# EAGLE board FluxR3-v3auto (EAGLE 7.2.0)
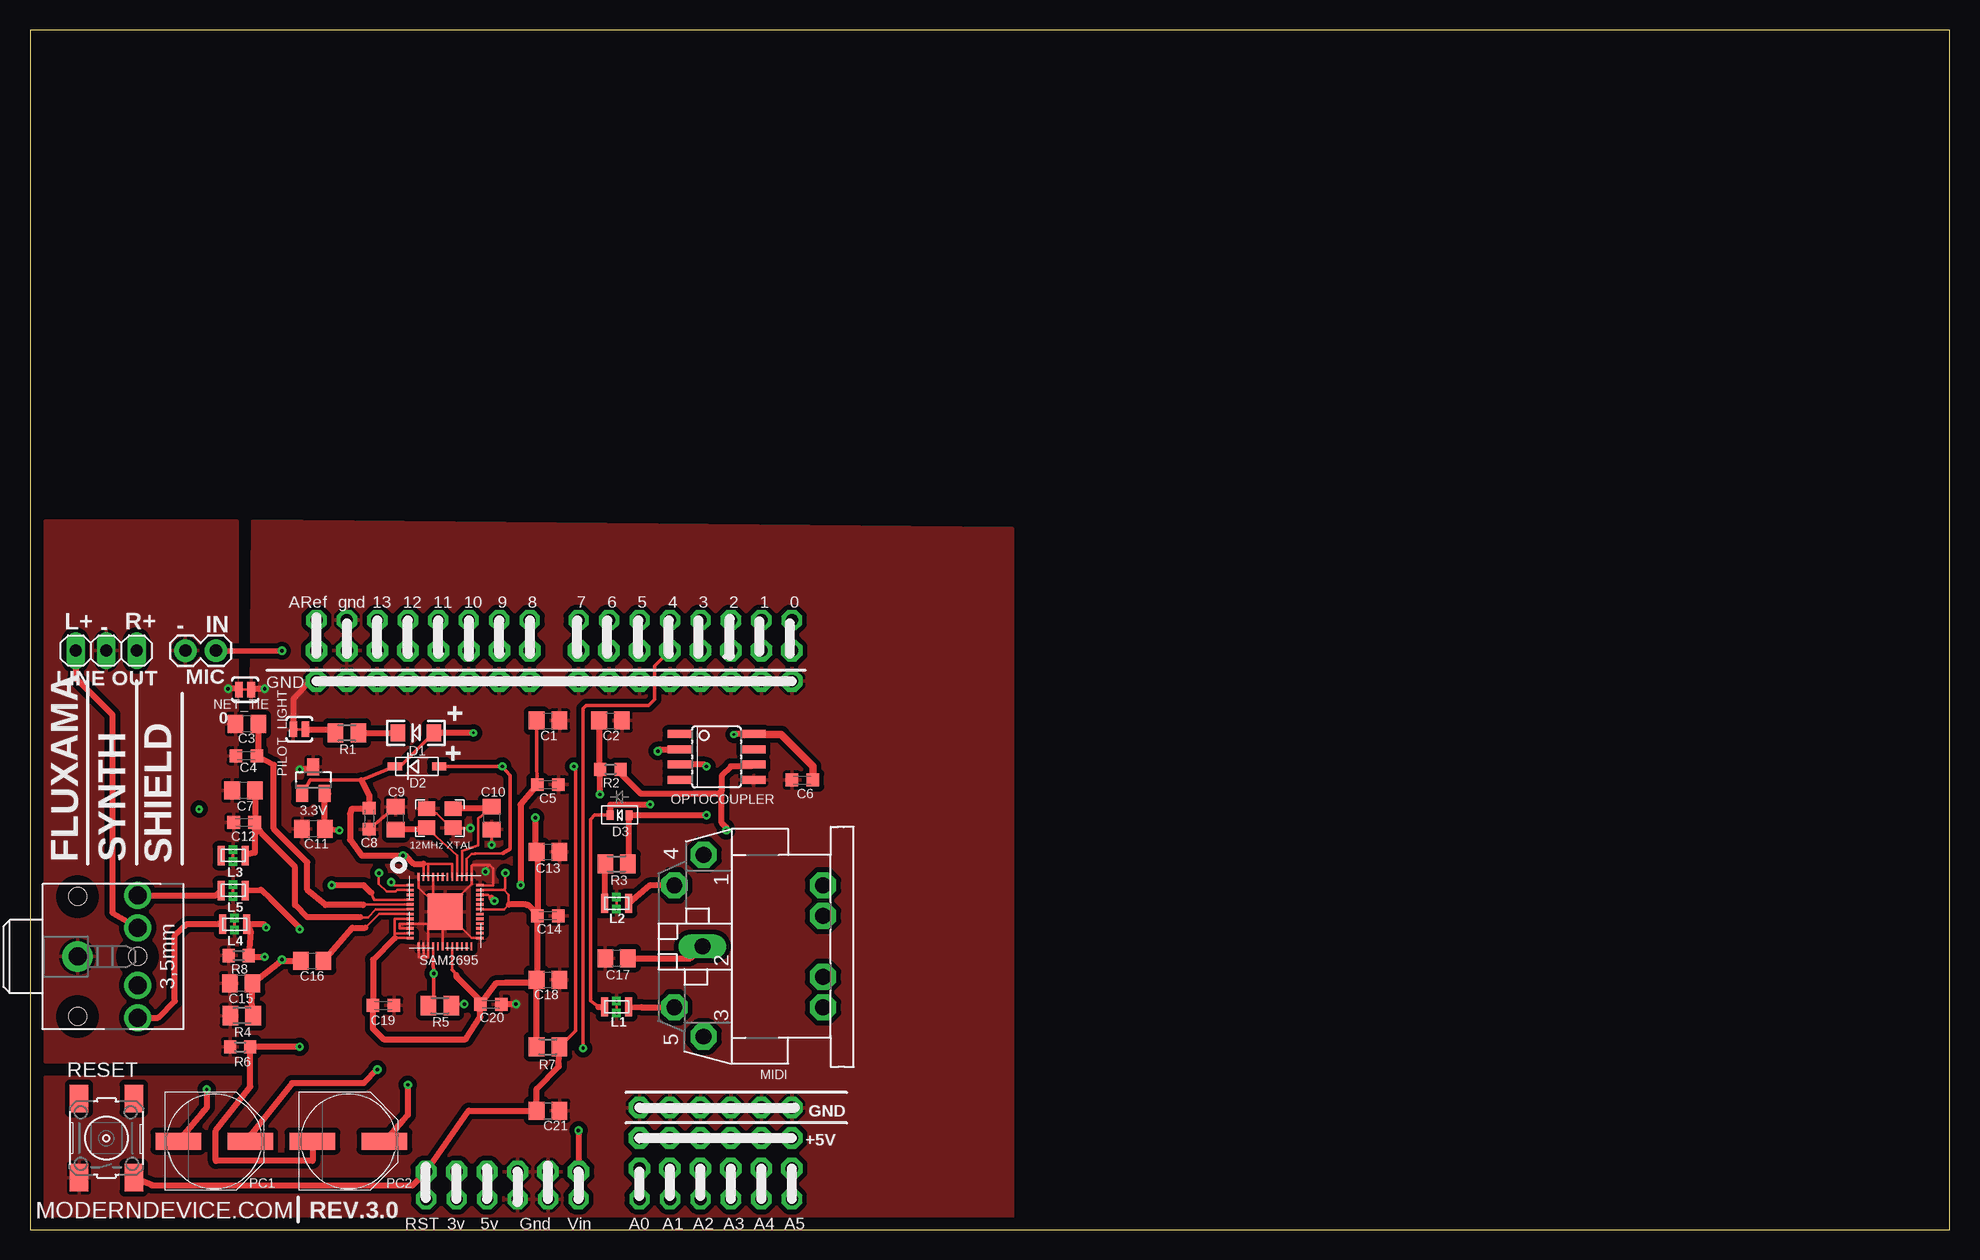
[diagram p0: board, top side]
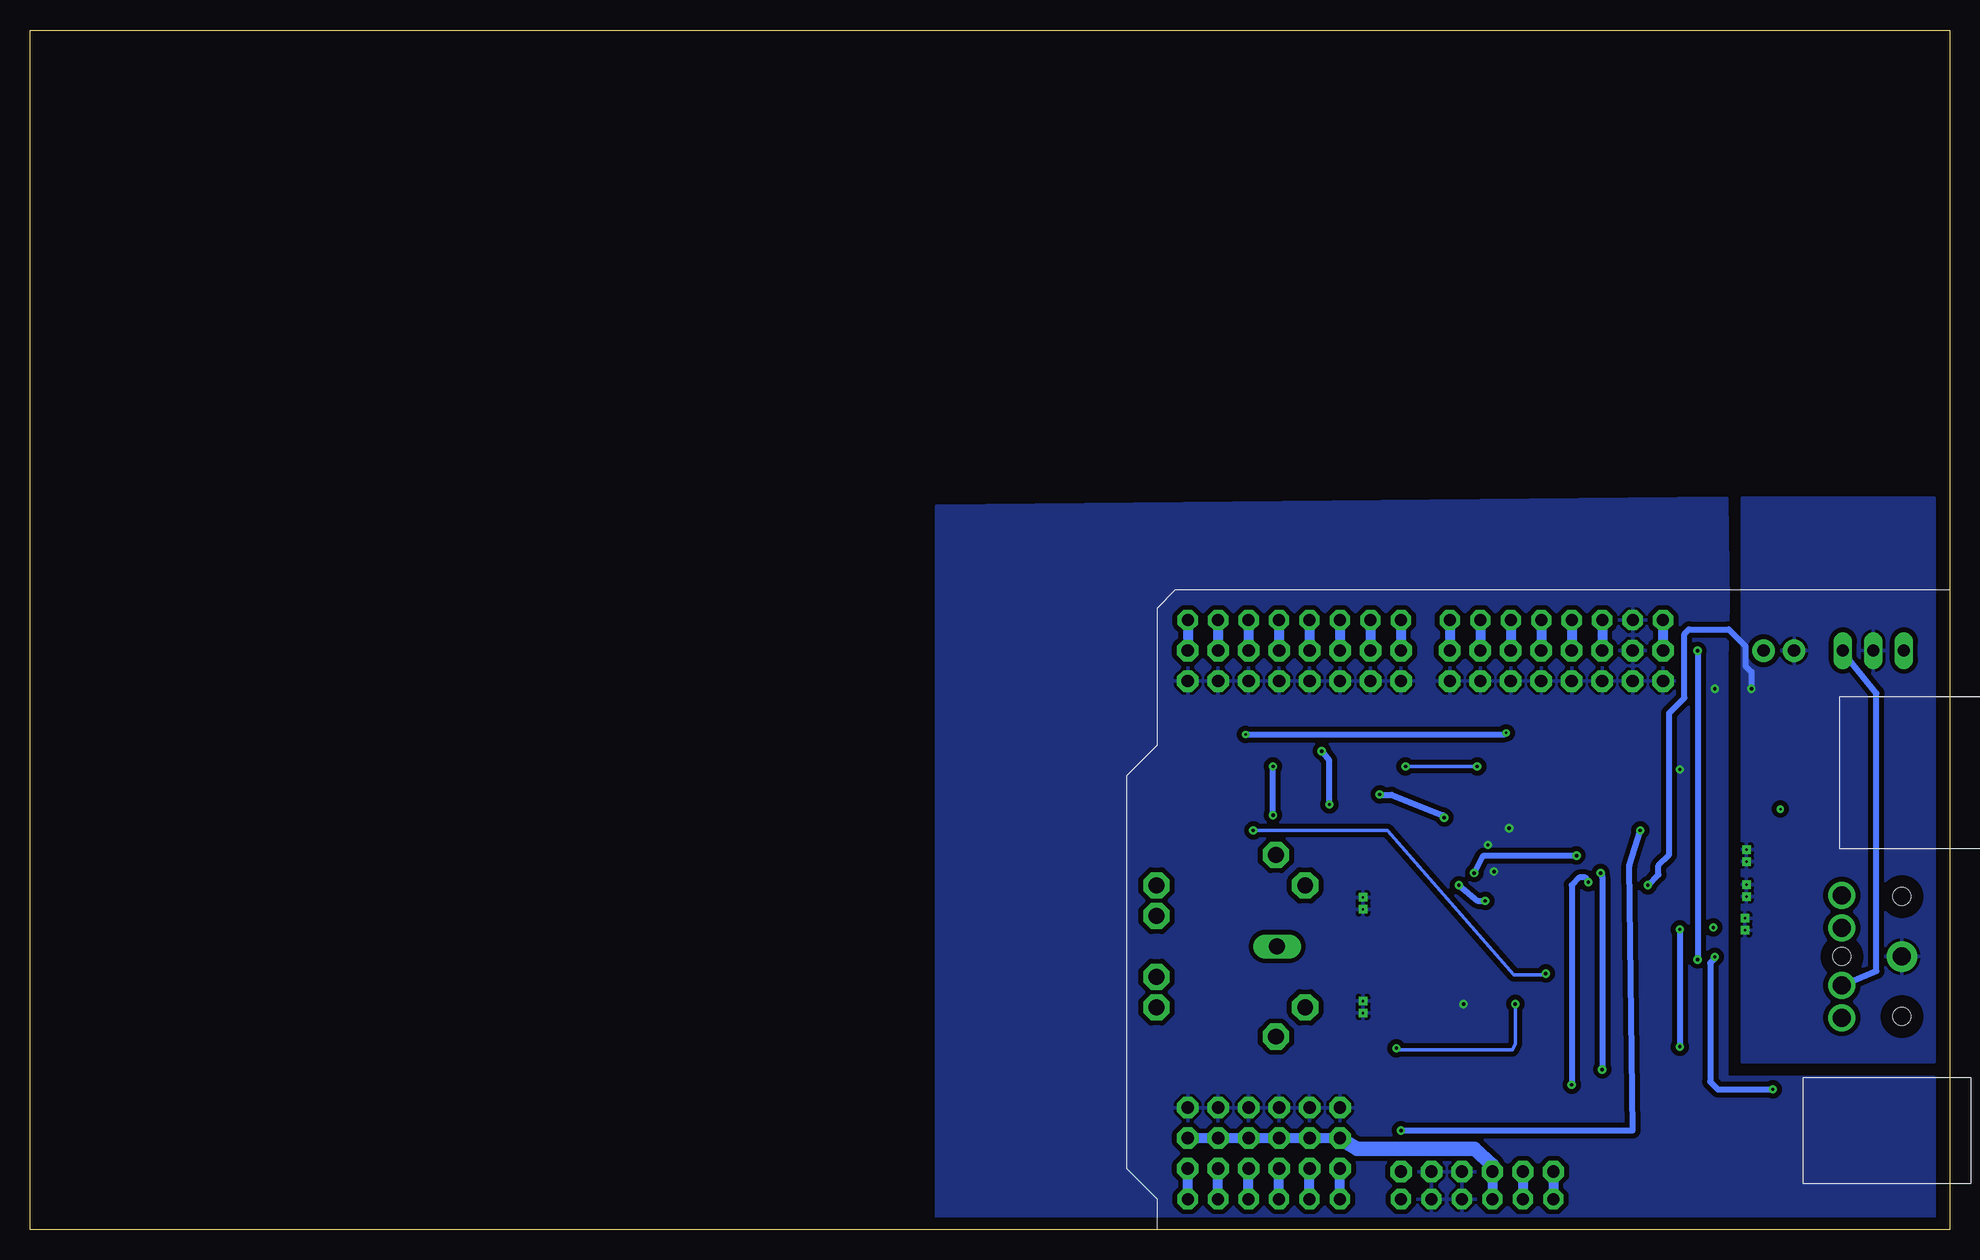
[diagram p1: board, bottom side, seen from below]

Size 160 x 100 mm. Coordinates in mm from the lower left corner, seen from the top.
Outline: 0,0 160,0 160,100 0,100 0,0
Copper layers (1*16): Top 0.035mm / dielectric 1.5mm / Bottom 0.035mm
Design rules "default *": minimum track width 0.2mm, minimum drill 0.25mm, track to track 0.2mm, track to pad 0.2mm, pad to pad 0.2mm, via to via 0.2mm, smd to smd 0.2mm, copper to edge 40mil, drill to drill 8mil, minimum pad ring 10mil, minimum via ring 8mil, stop-mask expansion 4mil, vias tented up to drill 0mil, thermal gap 10mil
Net classes: 0 default: width 0.2 mm, drill 0.25 mm, clearance 0.2 mm; 1 GND: width 0.2 mm, drill 0.25 mm, clearance 0.2 mm; 2 VCC: width 0.2 mm, drill 0.25 mm, clearance 0.2 mm; 3 VBUS: width 0.2 mm, drill 0.25 mm, clearance 0.25 mm

## Footprints (pad centres in the part's own frame; a part is rotated, then mirrored left to right if it is on the bottom)
SOT23 = smd 1 x 1.4: 1 -0.95,-1.1; 2 0.95,-1.1; 3 0,1.1
ARDUINO-NOHOLE = drill 1 pad 1.676 octagon: 3V 35.56,2.54; 5V 38.1,2.54; A0 50.8,2.54; A1 53.34,2.54; A2 55.88,2.54; A3 58.42,2.54; A4 60.96,2.54; A5 63.5,2.54; AREF 23.876,50.8; D0 63.5,50.8; D1 60.96,50.8; D2 58.42,50.8; D3 55.88,50.8; D4 53.34,50.8; D5 50.8,50.8; D6 48.26,50.8; D7 45.72,50.8; D8 41.656,50.8; D9 39.116,50.8; D10 36.576,50.8; D11 34.036,50.8; D12 31.496,50.8; D13 28.956,50.8; GND 26.416,50.8; GND1 43.18,2.54; GND2 40.64,2.54; RESET 33.02,2.54; VIN 45.72,2.54
C0805 = smd 1.3 x 1.5: 1 -0.95,0; 2 0.95,0
C0603K = smd 1.05 x 1.08: 1 -0.875,0; 2 0.875,0
LED-1206 = smd 1.2 x 1.4: A -1.5,0; C 1.5,0
SOD-123 = smd 1.2 x 0.7: A 1.85,0; C -1.85,0
SOD-523 = smd 0.8 x 0.6: A 0,-0.8; K 0,0.8
STX3100 = drill 1.5 pad 2.54: 1 2.7,-0.1 | drill 1.5: 2 7.7,5; 3 7.7,2.3; 4 7.7,-2.5; 5 7.7,-5.2 | hole 1.5: 2.7,4.9; 2.7,-5.1; 7.7,-0.1
3PC = smd 0.6 x 1.6: 1 0.998,0.013; 3 -1.002,0.013 | drill 0.2 pad 0.6 square: 2A -0.002,-0.487; 2B -0.002,0.513
1X03 = drill 1.016 long: 1 -2.54,0; 2 0,0; 3 2.54,0
1X02 = drill 1.016 pad 1.88: 1 0,0; 2 2.54,0
CP-2350 = drill 1.321 pad 2.184 octagon: 1 7.62,12.58; 3 -7.52,12.58; 4 5.08,15.02; 5 -5.08,15.02; PE -2.54,2.62; PE1 -5.08,2.62; PE2 5.08,2.62; PE@ 2.54,2.62 | drill 1.321 long: 2 0,12.68
MODERNDEVICE_SJ_2S-TRACE = smd 0.635 x 1.27: 1 -0.508,0; 2 0.508,0
SOIC08 = smd 0.66 x 2.032: 1 -1.905,-3.073; 2 -0.635,-3.073; 3 0.635,-3.073; 4 1.905,-3.073; 5 1.905,3.073; 6 0.635,3.073; 7 -0.635,3.073; 8 -1.905,3.073
PANASONIC_E = smd 3.8 x 1.4: + 3,0; - -3,0
MODERNDEVICE_NX3225 = smd 1.4 x 1.2: 1 -1.1,-0.8; 2 1.1,-0.8; 3 1.1,0.8; 4 -1.1,0.8
M0805 = smd 1.3 x 1.6: 1 -0.95,0; 2 0.95,0
R0603 = smd 1 x 1.1: 1 -0.85,0; 2 0.85,0
6MM_SWITCH = smd 2.286 x 1.524: 1 -3.302,2.286; 2 3.302,2.286; 3 -3.302,-2.286; 4 3.302,-2.286
QFN48 = smd 0.65 x 0.2: 1 -2.9,2.3; 2 -2.9,1.9; 3 -2.9,1.5; 4 -2.9,1.1; 5 -2.9,0.7; 6 -2.9,0.3; 7 -2.9,-0.1; 8 -2.9,-0.5; 9 -2.9,-0.9; 10 -2.9,-1.3; 11 -2.9,-1.7; 12 -2.9,-2.1; 25 2.9,-2.1; 26 2.9,-1.7; 27 2.9,-1.3; 28 2.9,-0.9; 29 2.9,-0.5; 30 2.9,-0.1; 31 2.9,0.3; 32 2.9,0.7; 33 2.9,1.1; 34 2.9,1.5; 35 2.9,1.9; 36 2.9,2.3 | smd 0.2 x 0.65: 13 -2.2,-2.8; 14 -1.8,-2.8; 15 -1.4,-2.8; 16 -1,-2.8; 17 -0.6,-2.8; 18 -0.2,-2.8; 19 0.2,-2.8; 20 0.6,-2.8; 21 1,-2.8; 22 1.4,-2.8; 23 1.8,-2.8; 24 2.2,-2.8; 37 2.2,3; 38 1.8,3; 39 1.4,3; 40 1,3; 41 0.6,3; 42 0.2,3; 43 -0.2,3; 44 -0.6,3; 45 -1,3; 46 -1.4,3; 47 -1.8,3; 48 -2.2,3 | smd 3 x 3: EXP 0,0.1
1X8_CLEAN = drill 1.016 pad 1.778 octagon: P$1 -8.89,0; P$2 -6.35,0; P$3 -3.81,0; P$4 -1.27,0; P$5 1.27,0; P$6 3.81,0; P$7 6.35,0; P$8 8.89,0
1X6_CLEAN = drill 1.016 pad 1.778 octagon: P$1 -6.35,0; P$2 -3.81,0; P$3 -1.27,0; P$4 1.27,0; P$5 3.81,0; P$6 6.35,0

## Placement (x,y rotation side)
3.3V  3.3V  [SOT23]  23.62,37.47 0 top
ARDUINO  ARDUINO-NOHOLE  [ARDUINO-NOHOLE]  0,0 0 top
C1  10uf  [C0805]  43.18,42.42 0 top
C2  .1uf  [C0805]  48.39,42.42 0 top
C3  10uf  [C0805]  18.08,42.14 180 top
C4  .1uf  [C0603K]  18.03,39.5 180 top
C5  .1uf  [C0603K]  43.18,37.08 0 top
C6  .1uf  [C0603K]  64.39,37.47 180 top
C7  10uf  [C0805]  17.81,36.6 180 top
C8  .1uf  [C0603K]  28.27,34.23 270 top
C9  22pf  [C0805]  30.48,34.29 90 top
C10  22pf  [C0805]  38.48,34.29 270 top
C11  10uf  [C0805]  23.62,33.4 180 top
C12  .1uf  [C0603K]  17.86,33.93 180 top
C13  10uf  [C0805]  43.18,31.5 0 top
C14  .1uf  [C0603K]  43.18,26.16 0 top
C15  220pf  [C0805]  17.6,20.52 180 top
C16  1uf  [C0805]  23.52,22.38 180 top
C17  .1uf  [C0805]  48.9,22.61 180 top
C18  10uf  [C0805]  43.18,20.83 0 top
C19  .1uf  [C0603K]  29.46,18.67 0 top
C20  .1uf  [C0603K]  38.41,18.77 0 top
C21  1uF  [C0805]  43.18,9.91 0 top
D1  [LED-1206]  32.18,41.4 180 top
D2  [SOD-123]  32.26,38.61 0 top
D3  [SOD-523]  49.15,34.54 90 top
JACK  STEREOJACK  [STX3100]  1.27,22.86 0 top
L1  NFM21CC223R1H3D  [3PC]  48.9,18.54 0 top
L2  NFM21CC223R1H3D  [3PC]  48.9,27.18 0 top
L3  NFM21CC223R1H3D  [3PC]  16.93,31.16 0 top
L4  NFM21CC223R1H3D  [3PC]  17.06,25.44 0 top
L5  NFM21CC223R1H3D  [3PC]  16.93,28.24 0 top
LINEOUT  [1X03]  6.35,48.26 0 top
MIC_JACK  [1X02]  12.95,48.26 0 top
MIDI  MIDIJACK  [CP-2350]  68.73,23.6 90 top
NET_TIE  MODERNDEVICE_SOLDERJUMPERTRACE  [MODERNDEVICE_SJ_2S-TRACE]  17.93,45.01 180 top
OPTOCOUPLER  HCPL0500  [SOIC08]  57.22,39.4 270 top
PC1  100u  [PANASONIC_E]  15.37,7.37 0 top
PC2  100u  [PANASONIC_E]  26.54,7.37 0 top
PILOT_LIGHT  MODERNDEVICE_SOLDERJUMPERTRACE  [MODERNDEVICE_SJ_2S-TRACE]  22.45,41.71 0 top
Q1  CX3225GB12000P0HPQCC, 253-1168-1-ND  [MODERNDEVICE_NX3225]  34.16,34.29 0 top
R1  1K  [M0805]  26.42,41.4 0 top
R2  4.7k  [R0603]  48.39,38.35 0 top
R3  220  [M0805]  48.9,30.48 180 top
R4  4.7k  [M0805]  17.65,17.83 0 top
R5  220  [M0805]  34.16,18.67 180 top
R6  47k  [R0603]  17.52,15.22 0 top
R7  10k  [M0805]  43.18,15.24 180 top
R8  47k  [R0603]  17.4,22.84 0 top
RESET  [6MM_SWITCH]  6.37,7.62 90 top
SAM2695  SAM2695  [QFN48]  34.6,26.4 0 top
U$1  1X8_CLEAN  [1X8_CLEAN]  32.77,48.26 0 top
U$2  1X8_CLEAN  [1X8_CLEAN]  54.61,48.26 0 top
U$3  1X8_CLEAN  [1X8_CLEAN]  32.77,45.72 0 top
U$4  1X8_CLEAN  [1X8_CLEAN]  54.61,45.72 0 top
U$10  1X6_CLEAN  [1X6_CLEAN]  57.15,10.16 0 top
U$11  1X6_CLEAN  [1X6_CLEAN]  57.15,7.62 0 top
U$12  1X6_CLEAN  [1X6_CLEAN]  39.37,4.83 180 top
U$13  1X6_CLEAN  [1X6_CLEAN]  57.15,5.08 180 top

## Library data of the parts
3.3V RESET = ng
ARDUINO D1-D3 L1-L5 MIC_JACK MIDI PC1 PC2 SAM2695 U$1-U$4 U$10-U$13 = ModernDevice
C1-C21 R1-R8 = rcl
JACK = adafruit
LINEOUT = pinhead
NET_TIE PILOT_LIGHT Q1 = BBLeo_v2
OPTOCOUPLER = optocoupler; MF: AGILENT TECHNOLOGIES; MPN: HCPL-0500-000E; OC_FARNELL: 9995226; OC_NEWARK: 31K6926

## Nets
+3V3 [VCC]: 3.3V.1 C2.1 C6.1 C8.1 C13.1 C14.1 C18.1 C19.1 C20.1 D1.A D2.C OPTOCOUPLER.8 R2.1 R7.2 SAM2695.8 SAM2695.11 SAM2695.12 SAM2695.20 SAM2695.31 SAM2695.35 SAM2695.41 SAM2695.46 SAM2695.47
+5V [VCC]: ARDUINO.5V U$11.P$1 U$11.P$2 U$11.P$3 U$11.P$4 U$11.P$5 U$11.P$6 U$12.P$4
A0: ARDUINO.A0 U$13.P$6
A1: ARDUINO.A1 U$13.P$5
A2: ARDUINO.A2 U$13.P$4
A3: ARDUINO.A3 U$13.P$3
A4: ARDUINO.A4 U$13.P$2
A5: ARDUINO.A5 U$13.P$1
AGND [GND]: C3.2 C4.2 C7.2 C12.2 C15.2 JACK.1 L3.2A L3.2B L4.2A L4.2B L5.2A L5.2B LINEOUT.2 MIC_JACK.1 NET_TIE.2 R4.1 R6.1 R8.1 SAM2695.4
AOUTL: PC2.+ SAM2695.1
AOUTR: PC1.+ SAM2695.2
GND [GND]: 3.3V.3 ARDUINO.GND ARDUINO.GND1 ARDUINO.GND2 C1.2 C2.2 C5.2 C6.2 C8.2 C9.2 C10.2 C11.2 C13.2 C14.2 C17.2 C18.2 C19.2 C20.2 C21.2 L1.2A L1.2B L2.2A L2.2B NET_TIE.1 OPTOCOUPLER.5 PILOT_LIGHT.1 Q1.2 Q1.4 RESET.1 SAM2695.9 SAM2695.10 SAM2695.13 SAM2695.14 SAM2695.15 SAM2695.18 SAM2695.25 SAM2695.36 SAM2695.37 SAM2695.45 SAM2695.48 SAM2695.EXP U$1.P$2 U$3.P$1 U$3.P$2 U$3.P$3 U$3.P$4 U$3.P$5 U$3.P$6 U$3.P$7 U$3.P$8 U$4.P$1 U$4.P$2 U$4.P$3 U$4.P$4 U$4.P$5 U$4.P$6 U$4.P$7 U$4.P$8 U$10.P$1 U$10.P$2 U$10.P$3 U$10.P$4 U$10.P$5 U$10.P$6 U$12.P$2 U$12.P$3
MICIN: C16.1 SAM2695.7
MICROPHONE: C15.1 C16.2 MIC_JACK.2 R4.2
MIDI_FROM_ARDUINO: ARDUINO.D4 R5.1 U$2.P$4
MIDI_IN: OPTOCOUPLER.6 R2.2 R5.2 SAM2695.16
N$1: ARDUINO.D1 U$2.P$7
N$2: L2.1 MIDI.4
N$4: ARDUINO.3V U$12.P$5
N$5: L5.1 PC2.- R6.2
N$6: JACK.5 L4.3
N$7: L2.3 R3.2
N$8: D3.K L1.3 OPTOCOUPLER.2
N$9: D1.C R1.2
N$10: C17.1 MIDI.2
N$11: L1.1 MIDI.5
N$13: D3.A OPTOCOUPLER.3 R3.1
N$14 [VCC]: L3.3
N$15: ARDUINO.D8 U$1.P$8
N$19: ARDUINO.D9 U$1.P$7
N$21: JACK.4 LINEOUT.3
N$22: ARDUINO.D11 U$1.P$5
N$23: ARDUINO.D10 U$1.P$6
N$24: JACK.3 LINEOUT.1
N$25: ARDUINO.D12 U$1.P$4
N$26: ARDUINO.D13 U$1.P$3
N$27: ARDUINO.D6 U$2.P$2
N$28: ARDUINO.AREF U$1.P$1
N$29: ARDUINO.D5 U$2.P$3
N$30: ARDUINO.D0 U$2.P$8
N$31: ARDUINO.D2 U$2.P$6
N$32: ARDUINO.D3 U$2.P$5
N$35: ARDUINO.D7 U$2.P$1
N$47: PILOT_LIGHT.2 R1.1
OUT_L: JACK.2 L5.3
OUT_R: L4.1 PC1.- R8.2
OUTVC12: C1.1 C5.1 SAM2695.34
RST: ARDUINO.RESET C21.1 D2.A R7.1 RESET.3 SAM2695.38 U$12.P$6
VA33 [VCC]: C7.1 C12.1 L3.1 SAM2695.6
VCM: C3.1 C4.1 SAM2695.5
VIN [VCC]: 3.3V.2 ARDUINO.VIN C11.1 U$12.P$1
XTL1: C10.1 Q1.3 SAM2695.39
XTL2: C9.1 Q1.1 SAM2695.40

## Tracks (layer width: path | path; a pad name or v marks a point on that pad's centre or on a via)
+3V3  (via drill 0.2 pad 0.61, 0.28)
  Top 0.2: SAM2695.8 30.4,25.9 30.4,24.7 | SAM2695.11 30.4,24.7 | SAM2695.12 30.4,24.3 30.4,24.7 | 35.2,23.54 SAM2695.20 35.2,21.66 | SAM2695.31 39.5,26.7 39.9,27.1 39.9,27.9 39.5,28.3 | 39.5,28.3 SAM2695.35 | SAM2695.47 32.8,30.5 33.2,30.5 | 33.2,30.5 SAM2695.46 | SAM2695.41 35.2,30.5 33.2,30.5 | 39.5,28.3 39.62,28.42 v39.62,29.72
  Top 0.305: D2.C 30.86,38.61 33.66,41.4 33.78,41.3 D1.A | D2.C 30.5,38.61 | 3.3V.1 22.67,36.26 23.37,37.47 27.64,37.47 D2.C | 35.2,21.66 35.56,21.21 | 37.53,19.11 C20.1
  Top 0.508: OPTOCOUPLER.8 58.7,41.3 v58.67,41.27 | v36.96,41.4 D1.A | C2.1 47.44,38.45 R2.1 47.5,38.31 v47.5,36.28 | R7.2 C18.1 | C18.1 41.98,20.57 39.62,20.57 38.8,20.52 C20.1 37.53,17.72 36.32,15.88 29.46,15.88 28.57,16.76 28.57,18.66 C19.1 28.59,22.49 30.4,24.3 | C18.1 42.3,20.9 C14.1 | 27.64,37.47 28.27,36.19 C8.1 28.22,35.05 26.8,35.05 26.67,34.67 26.67,32.51 27.66,31.17 v31.09,31.17 31.32,31.17 31.98,30.5 32.8,30.5 | C14.1 42.29,26.18 42.29,26.29 41.53,27.05 41.4,27.05 41.35,27.1 39.9,27.1 | C14.1 42.3,31.42 C13.1 42.33,31.88 42.09,31.94 v42.12,34.34 | 37.53,19.11 35.56,21.08 35.56,21.21
  Top 0.61: C6.1 65.26,38.62 62.61,41.27 60.32,41.27 OPTOCOUPLER.8
  Bottom 0.508: v58.67,41.27 37.08,41.27 v36.96,41.4 | v39.62,29.72 38.84,31.17 v31.09,31.17 | v47.5,36.28 47.5,36.25 46.49,36.23 42.23,34.54 v42.12,34.34
+5V
  Bottom 0.508: 38.1,5.33 38.1,4.32
  Bottom 0.813: U$11.P$1 U$11.P$2 U$11.P$3 U$11.P$4 U$11.P$5 U$11.P$6 | U$12.P$4 38.1,4.32 ARDUINO.5V
  Bottom 1.216: U$11.P$1 49.4,6.73 39.62,6.73 38.1,5.33
A0
  Bottom 0.813: ARDUINO.A0 U$13.P$6
A1
  Bottom 0.813: ARDUINO.A1 U$13.P$5
A2
  Bottom 0.813: ARDUINO.A2 U$13.P$4
A3
  Bottom 0.813: ARDUINO.A3 U$13.P$3
A4
  Bottom 0.813: ARDUINO.A4 U$13.P$2
A5
  Bottom 0.813: ARDUINO.A5 U$13.P$1
AGND  (via drill 0.28)
  Top 0.2: 28.45,28.07 28.7,27.5 SAM2695.4
  Top 0.508: NET_TIE.2 17.37,45.09 v16.51,45.09 | 28.45,28.07 27.81,28.7 v25.15,28.7 | R8.1 16.65,22.68
  Bottom 0.508: 16.86,24.97 L4.2A | v25.15,28.7 24.26,29.59 24.26,30.35 23.37,31.24 23.37,43.05 22.1,44.32 22.1,49.66 21.72,50.04 18.41,50.04 17.02,48.64 17.02,46.99 16.51,46.48 v16.51,45.09
  pour Bottom (isolate 0.406): 1.27,60.96 17.27,60.96 17.27,13.97 1.27,13.97
  pour Top (isolate 0.406): 1.27,59.05 17.27,59.05 17.27,13.97 1.27,13.97
AOUTL  (via drill 0.28)
  Top 0.2: 30.5,28.7 SAM2695.1 30.35,28.7 v30.1,28.96
  Top 0.508: v31.5,12.06 31.5,9.53 31.07,9.06 PC2.+
  Bottom 0.2: v30.1,28.96 30.1,29.08
  Bottom 0.508: 30.1,29.08 30.35,29.34 30.86,29.34 31.5,28.7 v31.5,12.06
AOUTR  (via drill 0.28)
  Top 0.2: SAM2695.2 30.59,28.3 30.48,28.19 29.72,28.19 29.08,28.83 v29.08,29.72
  Top 0.508: v28.96,13.34 27.81,12.19 21.84,12.19 18.37,7.83 PC1.+
  Bottom 0.508: v29.08,29.72 28.96,29.34 v28.96,13.34
GND  (via drill 0.28)
  Top 0.2: SAM2695.18 34.4,25.9 34.6,26.1 SAM2695.EXP | SAM2695.13 32.4,22.7 32.8,22.7 | 32.8,22.7 33.2,22.7 SAM2695.15 33.2,25.5 | SAM2695.14 32.8,22.7 | SAM2695.25 36.8,24.3 SAM2695.EXP | SAM2695.EXP 33.6,25.5 33.2,25.5 | 33.2,25.5 SAM2695.9 30.8,25.5 30.8,25.1 SAM2695.10 | SAM2695.45 33.6,27.3 | 33.6,27.3 33.6,27.1 34.2,26.5 SAM2695.EXP | 38.3,30.4 36.9,30.4 36.8,30.3 SAM2695.37 36.8,28.8 34.6,26.6 SAM2695.EXP | 38.3,30.4 38.6,30.1 38.6,28.7 SAM2695.36 | SAM2695.48 32.4,28.5 33.6,27.3 | Q1.4 33.86,34.67 33.91,34.67 35.09,33.49 Q1.2 35.56,33.45 v36.7,33.45 | C10.2 v38.48,32.06 | 38.3,30.4 37.97,30.07 v37.97,29.84
  Top 0.305: C9.2 28.22,33.36
  Top 0.508: U$3.P$1 23.37,45.72 21.94,44.18 21.94,41.79 PILOT_LIGHT.1 | NET_TIE.1 18.39,45.21 18.52,45.09 v19.56,45.09 | 28.22,33.36 C8.2 | 3.3V.3 23.32,38.35 v22.48,38.35 | C20.2 39.31,18.8 v40.51,18.8
  Bottom 0.2: v37.97,29.84 37.85,29.84 | v36.7,33.45 36.7,33.4
  pour Bottom (isolate 0.406): 18.54,60.96 18.44,52.12 18.54,47.45 18.54,12.7 1.27,12.7 1.27,-10.79 84.45,-11.43 84.45,60.33
  pour Top (isolate 0.406): 18.54,59.05 18.44,44.45 18.44,44.45 18.44,12.7 1.27,12.7 1.27,-8.89 81.92,-9.53 81.92,58.42
MICIN
  Top 0.2: 27.94,25.15 29.09,26.3 SAM2695.7
  Top 0.508: C16.1 26.86,25.15 27.94,25.15
MICROPHONE  (via drill 0.28)
  Top 0.508: MIC_JACK.2 v21,48.25 | v21,22.5 20.95,22.55 | R4.2 18.43,18.92 C15.1 20.89,22.35 v21,22.5 | 22.14,22.43 C16.2 21.06,22.38 v21,22.5
  Bottom 0.508: v21,48.25 v21,22.5
MIDI_FROM_ARDUINO  (via drill 0.28)
  Top 0.305: U$2.P$4 52.07,46.99 52.07,44.2 51.56,43.69 46.35,43.69 46.1,43.43 v46.1,15.11 | v36.2,18.8 35.37,18.73 R5.1
  Bottom 0.305: v46.1,15.11 45.97,14.99 36.45,14.99 36.2,15.49 v36.2,18.8
  Bottom 0.813: ARDUINO.D4 U$2.P$4
MIDI_IN  (via drill 0.28)
  Top 0.2: SAM2695.16 33.6,22.17
  Top 0.305: R5.2 33.66,19.11 v33.66,21.34 33.66,21.48 33.6,22.17 | v58.04,33.27 58.04,33.53
  Top 0.508: OPTOCOUPLER.6 60.14,38.61 58.42,38.61 57.66,37.85 57.66,36.58 | 57.66,36.58 57.4,36.32 50.93,36.32 49.24,38.01 R2.2 | 58.04,33.53 57.66,33.91 57.66,36.58
  Bottom 0.305: v33.66,21.34 33.66,21.21 36.32,21.21 46.86,33.27 v58.04,33.27
N$1
  Bottom 0.813: ARDUINO.D1 U$2.P$7
N$2
  Top 0.508: MIDI.4 51.64,28.68 L2.1
N$4
  Bottom 0.813: U$12.P$5 ARDUINO.3V
N$5  (via drill 0.28)
  Top 0.508: PC2.- 23.54,5.71 15.49,5.71 15.49,8.26 18.37,11.9 R6.2 22.33,15.22 22.35,15.24 v22.48,15.24 | 17.96,28.4 L5.1 19.26,28.32 20.07,27.56 22.48,25.15 v22.48,25.02
  Bottom 0.508: v22.48,25.02 v22.48,15.24
N$6
  Top 0.508: JACK.5 10.68,17.66 12.06,19.05 12.06,24.51 13.09,25.48 15.71,25.48 L4.3
N$7
  Top 0.508: R3.2 47.89,30.43 L2.3
N$8  (via drill 0.28)
  Top 0.305: D3.K 47.08,34.54 46.74,34.2 46.74,19.05 47.38,18.55
  Top 0.508: D3.K 48.39,34.58 48.39,35.43 v51.69,35.43 | v52.32,39.88 52.48,40.03 OPTOCOUPLER.2 | 47.38,18.55 L1.3
  Bottom 0.508: v51.69,35.43 51.69,39.12 v52.32,39.88
N$9
  Top 0.508: R1.2 D1.C
N$10
  Top 0.508: C17.1 55.05,22.61 MIDI.2
N$11
  Top 0.508: L1.1 50.94,18.52 MIDI.5
N$13  (via drill 0.28)
  Top 0.508: R3.1 49.95,30.63 D3.A v56.39,34.54 | v56.39,38.61 56.23,38.76 OPTOCOUPLER.3
  Bottom 0.508: v56.39,34.54 v56.39,38.61
N$15
  Bottom 0.813: ARDUINO.D8 U$1.P$8
N$16  (via drill 0.2 pad 0.61)
  other vias: 14.1,35.05
N$19
  Bottom 0.813: ARDUINO.D9 U$1.P$7
N$21
  Bottom 0.508: JACK.4 6.1,21.55 6.1,44.7 8.89,48.13 LINEOUT.3
N$22
  Bottom 0.813: ARDUINO.D11 U$1.P$5
N$23
  Bottom 0.813: ARDUINO.D10 U$1.P$6
N$24
  Top 0.508: LINEOUT.1 3.81,45.97 6.86,42.93 6.86,26.42 8.97,25.19 JACK.3
N$25
  Bottom 0.813: ARDUINO.D12 U$1.P$4
N$26
  Bottom 0.813: ARDUINO.D13 U$1.P$3
N$27
  Bottom 0.813: ARDUINO.D6 U$2.P$2
N$28
  Bottom 0.813: ARDUINO.AREF U$1.P$1
N$29
  Bottom 0.813: ARDUINO.D5 U$2.P$3
N$30
  Bottom 0.813: ARDUINO.D0 U$2.P$8
N$31
  Bottom 0.813: ARDUINO.D2 U$2.P$6
N$32
  Bottom 0.813: ARDUINO.D3 U$2.P$5
N$35
  Bottom 0.813: ARDUINO.D7 U$2.P$1
N$47
  Top 0.508: PILOT_LIGHT.2 25.16,41.71 R1.1
OUT_L
  Top 0.508: JACK.2 15.5,27.86 L5.3
OUT_R  (via drill 0.28)
  Top 0.203: 14.4,10.03 PC1.-
  Top 0.508: v19.68,25.18 v19.69,25.18 19.48,25.44 L4.1 18.38,24.89 R8.2 18.4,22.73 v19.56,22.73 | v14.73,11.68 14.73,10.16 PC1.-
  Bottom 0.508: v19.56,22.73 19.56,22.61 19.94,22.23 19.94,12.32 19.3,11.68 v14.73,11.68
OUTVC12  (via drill 0.28)
  Top 0.2: SAM2695.34 38.2,27.9 38.45,27.65
  Top 0.305: C1.1 42.23,38.43 C5.1
  Top 0.508: C5.1 40.89,35.42 v40.89,28.7 | v38.7,27.4 38.45,27.65
  Bottom 0.508: v40.89,28.7 39.34,27.4 v38.7,27.4
RST  (via drill 0.28)
  Top 0.2: SAM2695.38 36.4,30.9 36.83,31.33 37.08,31.33 37.12,31.37 39.4,31.37
  Top 0.305: 39.4,31.37 40.01,31.75 40.01,37.85 v39.37,38.61 D2.A | R7.1 45.47,16.58 45.47,38.48 v45.34,38.61
  Top 0.508: RESET.3 10.18,3.68 31.88,3.68 U$12.P$6 36.58,9.91 C21.1 42.23,11.75 44.07,13.59 44.07,13.78 R7.1
  Bottom 0.305: v45.34,38.61 v39.37,38.61
  Bottom 0.813: U$12.P$6 ARDUINO.RESET
VA33
  Top 0.2: 27.56,26.04 28.19,26.04 28.82,26.7 SAM2695.6
  Top 0.508: C7.1 18.75,32.94 C12.1 | C12.1 18.73,31.43 L3.1 | C12.1 19.41,32.92 22.1,30.23 22.1,27.05 23.11,26.04 27.56,26.04
VCM
  Top 0.2: SAM2695.5 27.8,27.1
  Top 0.508: C3.1 19.04,39.88 C4.1 20.32,38.73 20.32,33.4 23.11,30.61 23.11,28.32 24.64,27.05 27.75,27.05 27.8,27.1
VIN  (via drill 0.28)
  Top 0.508: ARDUINO.VIN U$12.P$1 v45.72,8.26 | v25.78,33.27 24.89,33.34 C11.1 3.3V.2 24.57,36 24.89,36.32
  Bottom 0.508: v45.72,8.26 26.42,8.26 26.67,30.35 v25.78,33.27
XTL1
  Top 0.2: SAM2695.39 36,31.55 37.34,32 37.34,34.29 38.1,34.8 38.35,35.05 35.55,35.05 Q1.3
  Top 0.508: C10.1 38.33,35.09 Q1.3
XTL2
  Top 0.2: SAM2695.40 35.6,31.21 Q1.1
  Top 0.508: Q1.1 33.17,33.34 C9.1

## Text on the board
tPlace: L+ | - | R+ | - | IN | LINE OUT | MIC | GND | 0 | + | + | FLUXAMA | SYNTH | SHIELD | RESET | GND | +5V | MODERNDEVICE.COM | REV.3.0
tNames: 12MHz XTAL